# Altium PCB isa_fdc.PcbDoc (part 1 of 2)
Units mm, origin at the board's own origin, x right, y up, seen from the top; angles counter-clockwise.
Board outline 104.14 x 83.82 mm, 2 copper layers (F.Cu, B.Cu); 36 components, 102 nets, 408 pads, 101 vias.
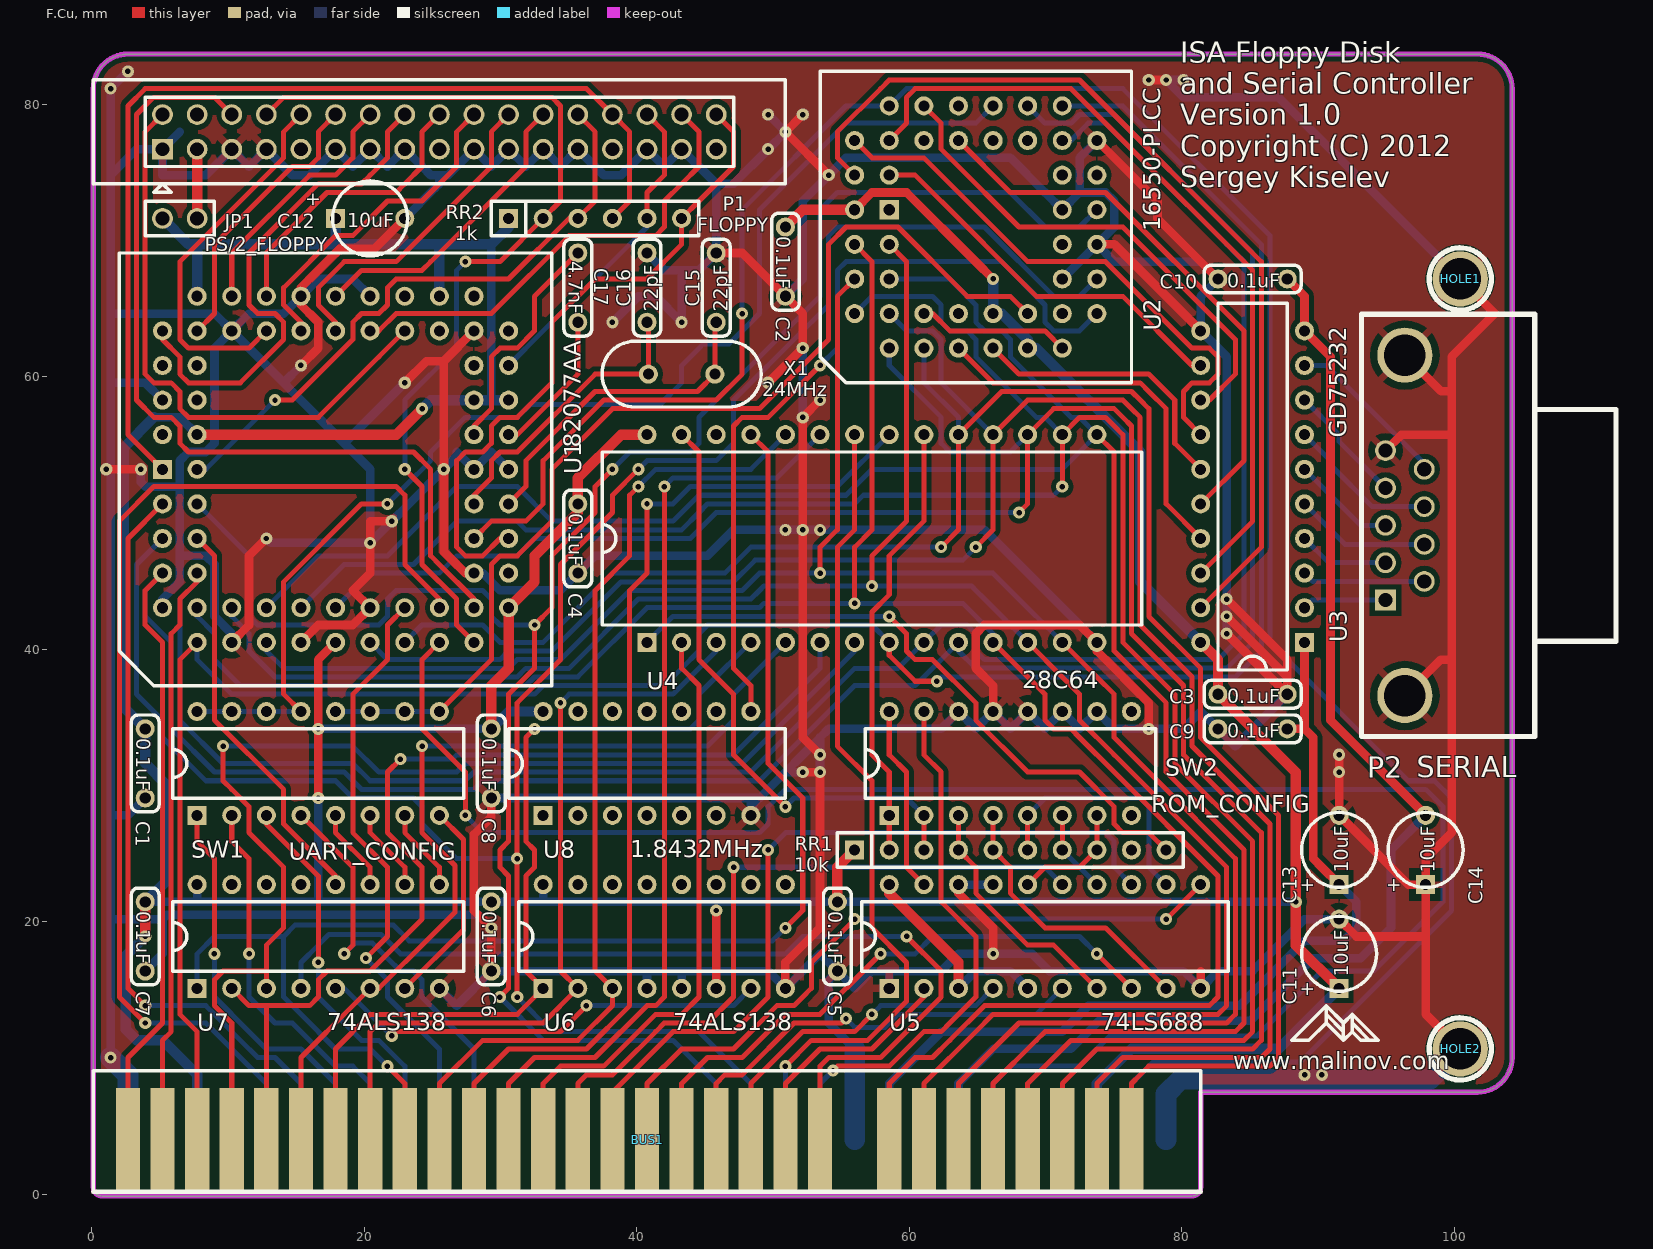
[diagram p0: F.Cu view]
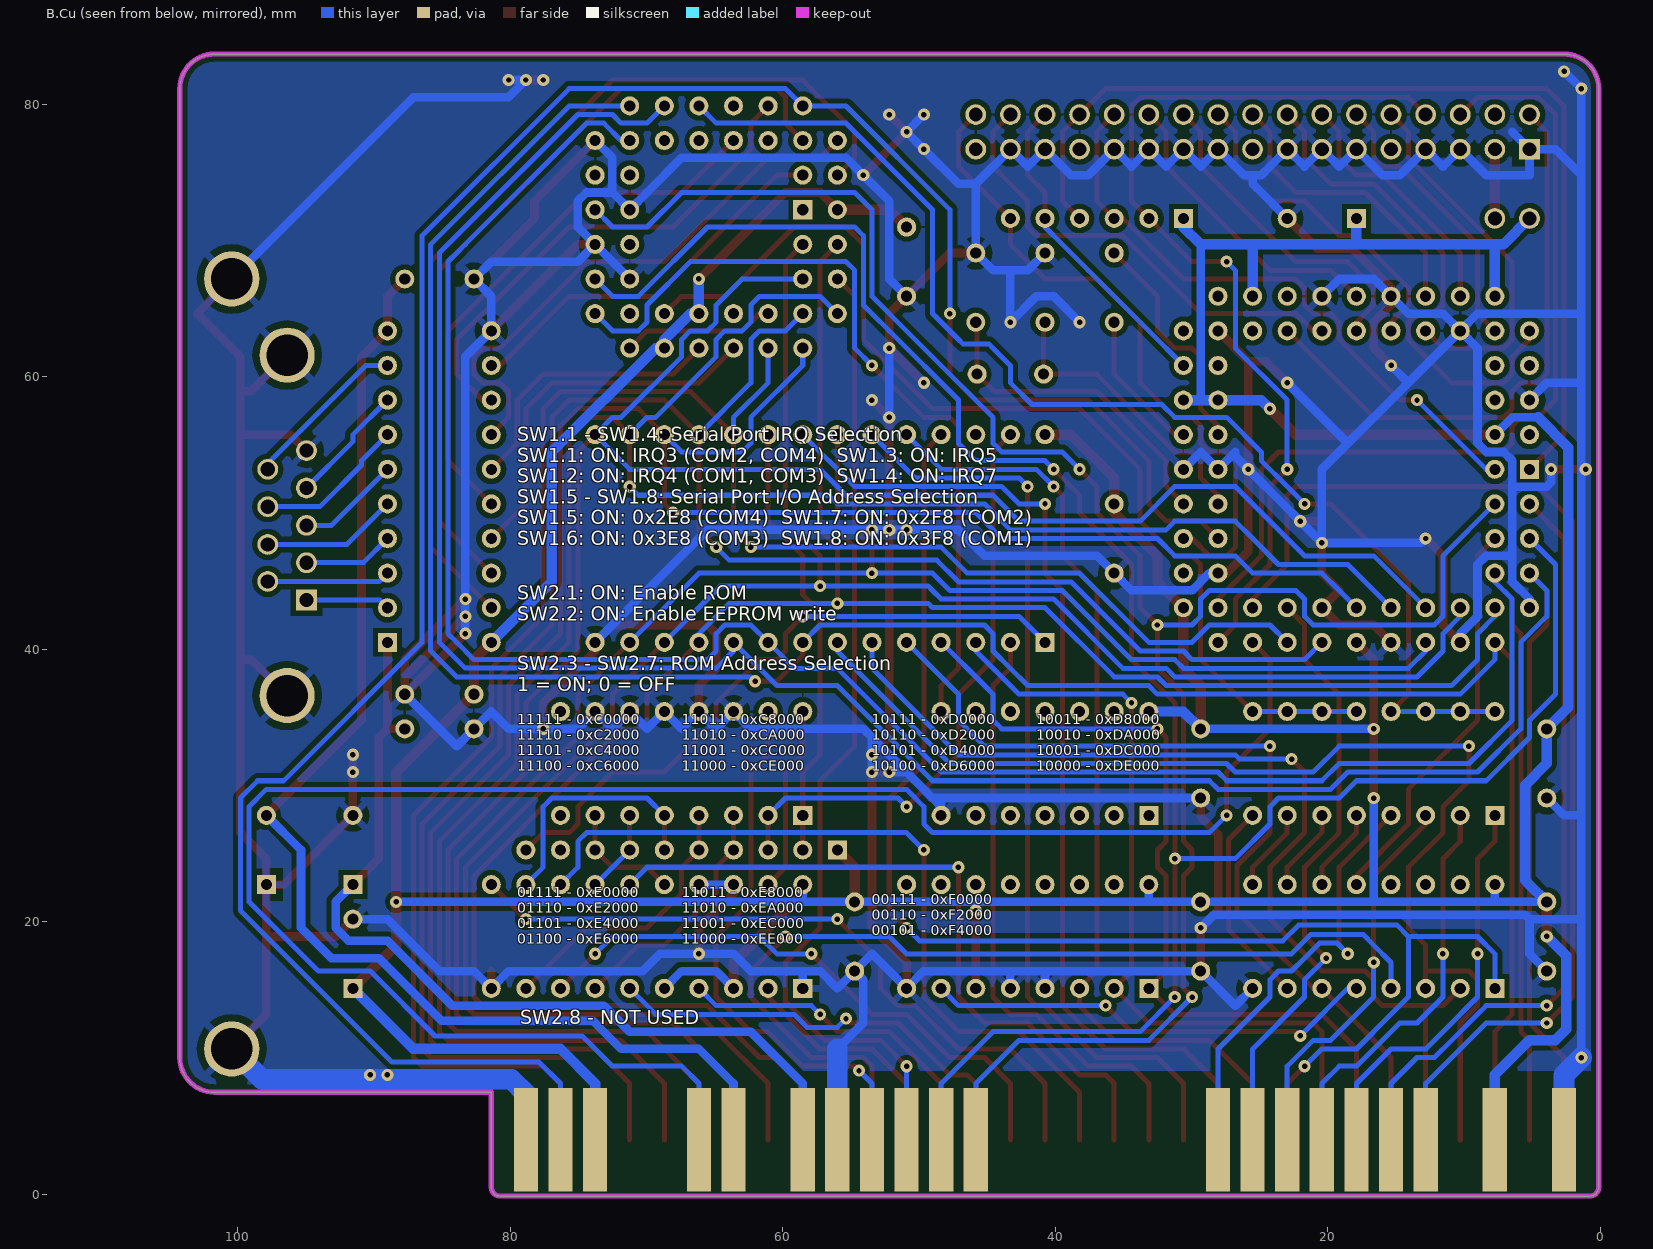
[diagram p1: B.Cu view, seen from below]

## Layer stack, top to bottom
F.Mask: solder mask 0.0102, Solder Resist, Dk 3.5
F.Cu: signal copper 0.0356
Dielectric 1: dielectric 0.32, FR-4, Dk 4.8
B.Cu: signal copper 0.0356
B.Mask: solder mask 0.0102, Solder Resist, Dk 3.5

## Board outline
104.267,81.153 104.267,10.033 cw(c101.727,10.033) 101.727,7.493 81.407,7.493 81.407,0.508 cw(c80.772,0.508) 80.772,-0.127 0.762,-0.127 cw(c0.762,0.508) 0.127,0.508 0.127,81.153 cw(c2.667,81.153) 2.667,83.693 101.727,83.693 cw(c101.727,81.153) 104.267,81.153

## Design rules (kind name [scope] priority, off if disabled: settings)
Clearance "Clearence 0.37846_Polygon" [InNamedPolygon('F.Cu-GND') OR InNamedPolygon('B.Cu-GND')] p1: gap=0.378 ignorepadtopadclearanceinfootprint=FALSE
MinimumSolderMaskSliver [All] p1: minsoldermaskwidth=0
PolygonConnect Polygon_B.Cu-GND_ConnectDirect [IsNamedPolygon('B.Cu-GND') vs IsVia] p1: connectstyle=Direct reliefconductorwidth=0.254 reliefentries=4 polygonreliefangle="90 Angle" airgapwidth=0.254
PolygonConnect Polygon_B.Cu-GND_ConnectRelief45 [IsNamedPolygon('B.Cu-GND') vs (IsThruPin or IsSMTPin) and (PadShape_AllLayers = 'Round')] p2: connectstyle=Relief reliefconductorwidth=0.508 reliefentries=4 polygonreliefangle="45 Angle" airgapwidth=0.508
PolygonConnect Polygon_B.Cu-GND_ConnectRelief90 [IsNamedPolygon('B.Cu-GND') vs (IsThruPin or IsSMTPin) and (PadShape_AllLayers <> 'Round')] p3: connectstyle=Relief reliefconductorwidth=0.508 reliefentries=4 polygonreliefangle="90 Angle" airgapwidth=0.508
PolygonConnect Polygon_F.Cu-GND_ConnectDirect [IsNamedPolygon('F.Cu-GND') vs IsVia] p4: connectstyle=Direct reliefconductorwidth=0.254 reliefentries=4 polygonreliefangle="90 Angle" airgapwidth=0.254
PolygonConnect Polygon_F.Cu-GND_ConnectRelief45 [IsNamedPolygon('F.Cu-GND') vs (IsThruPin or IsSMTPin) and (PadShape_AllLayers = 'Round')] p5: connectstyle=Relief reliefconductorwidth=0.508 reliefentries=4 polygonreliefangle="45 Angle" airgapwidth=0.508
PolygonConnect Polygon_F.Cu-GND_ConnectRelief90 [IsNamedPolygon('F.Cu-GND') vs (IsThruPin or IsSMTPin) and (PadShape_AllLayers <> 'Round')] p6: connectstyle=Relief reliefconductorwidth=0.508 reliefentries=4 polygonreliefangle="90 Angle" airgapwidth=0.508
RoutingVias [All] p1: holewidth=0.711 width=1.27 viastyle="Through Hole" minholewidth=0.711 minwidth=1.27 maxholewidth=0.711 maxwidth=1.27
SilkToSilkClearance [All] p1: silktosilkclearance=0
SilkToSolderMaskClearance [IsPad] p1: minsilkscreentomaskgap=0 clearancetoexposedcopper=TRUE
SolderMaskExpansion [All] p1: expansion=0.102 istentingtop=FALSE
Width [All] p1: maxlimit=10 minlimit=0.254 preferedwidth=0.254 minimp=50.000000 maximp=50.000000 favimp=50.000000
27 further rules are at their usual default settings.

## Components (designator, comment, footprint, x,y, rotation, side; value= is the part's Value field where it differs from the comment)
BUS1 "BUSPC_DEV" Conn_Bus_ISA8 40.767,4 r0 top
C1 "0.1uF" Cap_Cer_504 3.937,31.623 r270 top
C2 "0.1uF" Cap_Cer_504 50.927,68.453 r270 top
C3 "0.1uF" Cap_Cer_504 85.217,36.703 r0 top
C4 "0.1uF" Cap_Cer_504 35.687,48.133 r270 top
C5 "0.1uF" Cap_Cer_504 54.737,18.923 r270 top
C6 "0.1uF" Cap_Cer_504 29.337,18.923 r270 top
C7 "0.1uF" Cap_Cer_504 3.937,18.923 r270 top
C8 "0.1uF" Cap_Cer_504 29.337,31.623 r270 top
C9 "0.1uF" Cap_Cer_504 85.217,34.163 r180 top
C10 "0.1uF" Cap_Cer_504 85.217,67.183 r0 top
C11 "10uF" Cap_Tant_504 91.567,17.653 r90 top
C12 "10uF" Cap_Tant_504 20.447,71.628 r0 top
C13 "10uF" Cap_Tant_504 91.567,25.273 r90 top
C14 "10uF" Cap_Tant_504 97.917,25.273 r90 top
C15 "22pF" Cap_Cer_504 45.847,66.548 r90 top
C16 "22pF" Cap_Cer_504 40.767,66.548 r90 top
C17 "4.7nF" Cap_Cer_504 35.687,66.548 r270 top
HOLE1 "CONN_1" HOLE_3MM 100.457,67.183 r0 top
HOLE2 "CONN_1" HOLE_3MM 100.457,10.668 r0 top
JP1 "PS/2_FLOPPY" Conn_Pin_Header_2x1_Nokey 6.477,71.628 r0 top
P1 "FLOPPY" Conn_Pin_Header_17x2_Shroud 25.527,77.978 r0 top
P2 "SERIAL" Conn_Dsub_DE9M 96.393,49.098 r270 top
RR1 "10k" Conn_SIL-10 67.437,25.273 r0 top
RR2 "1k" Conn_SIL-6 36.957,71.628 r0 top
SW1 "UART_CONFIG" DIP16_300 16.637,31.623 r0 top
SW2 "ROM_CONFIG" DIP16_300 67.437,31.623 r0 top
U1 "82077AA" PLCC68_TH 17.907,53.213 r90 top
U2 "16550-PLCC" PLCC44_TH 64.897,70.993 r90 top
U3 "GD75232" DIP20_300 85.217,51.943 r90 top
U4 "28C64" DIP28_600 57.277,48.133 r0 top
U5 "74LS688" DIP20_300 69.977,18.923 r0 top
U6 "74ALS138" DIP16_300 42.037,18.923 r0 top
U7 "74ALS138" DIP16_300 16.637,18.923 r0 top
U8 "1.8432MHz" DIP14_300 40.767,31.623 r0 top
X1 "24MHz" Crystal_HC-49U_Vert 43.307,60.198 r180 top

## Footprints (in the part's own frame and the unit in brackets; to place one, negate y for a bottom-side part, rotate by r counter-clockwise, add the part's x,y. Pads: shape width x height; smd on the part's side, far side on the other; paste and mask are expansions set on the pad)
Cap_Cer_504 [mil]
  round 55 hole 32 paste-55 mask+10: 1(-100,0) 2(100,0)
  silkscreen extent -140,-40 140,40
Cap_Tant_504 [mil]
  rect 55x55 hole 32 paste-55 mask+10: 1(-100,0)
  round 55 hole 32 paste-55 mask+10: 2(100,0)
  silkscreen extent -108,-108 108,108
Conn_Bus_ISA8 [mil]
  rect 70x300 smd far side paste-300 mask+10: 1(1500,0) 2(1400,0) 3(1300,0) 6(1000,0) 7(900,0) 9(700,0) 10(600,0) 11(500,0) 12(400,0) 13(300,0) 14(200,0) 21(-500,0) 22(-600,0) 23(-700,0) 24(-800,0) 25(-900,0) 26(-1000,0) 27(-1100,0) 29(-1300,0) 31(-1500,0)
  rect 70x300 smd paste-300 mask+10: 33(1400,0) 34(1300,0) 35(1200,0) 36(1100,0) 37(1000,0) 38(900,0) 39(800,0) 40(700,0) 42(500,0) 43(400,0) 44(300,0) 45(200,0) 46(100,0) 47(0,0) 48(-100,0) 49(-200,0) 50(-300,0) 51(-400,0) 52(-500,0) 53(-600,0) 54(-700,0) 55(-800,0) 56(-900,0) 57(-1000,0) 58(-1100,0) 59(-1200,0) 60(-1300,0) 61(-1400,0) 62(-1500,0)
  silkscreen extent -1600,-150 1600,200
Conn_Dsub_DE9M [mil]
  rect 60x60 hole 41 paste-60 mask+10: 1(216,-56)
  round 60 hole 41 paste-60 mask+10: 2(108,-56) 3(0,-56) 4(-108,-56) 5(-216,-56) 6(162,56) 7(55,56) 8(-54,56) 9(-162,56)
  round 159.4 hole 120.1 paste-159.4 mask+10: Un1(491.9,0) Un2(-491.9,0)
  silkscreen extent -610,-125 610,610
Conn_Pin_Header_2x1_Nokey [mil]
  rrect100% 60x60 hole 40 paste-60 mask+10: 1(-50,0)
  round 60 hole 40 paste-60 mask+10: 2(50,0)
  silkscreen extent -100,-50 100,50
Conn_Pin_Header_17x2_Shroud [mil]
  rect 60x60 hole 40 paste-60 mask+10: 1(-800,-50)
  round 60 hole 40 paste-60 mask+10: 2(-800,50) 3(-700,-50) 4(-700,50) 5(-600,-50) 6(-600,50) 7(-500,-50) 8(-500,50) 9(-400,-50) 10(-400,50) 11(-300,-50) 12(-300,50) 13(-200,-50) 14(-200,50) 15(-100,-50) 16(-100,50) 17(0,-50) 18(0,50) 19(100,-50) 20(100,50) 21(200,-50) 22(200,50) 23(300,-50) 24(300,50) 25(400,-50) 26(400,50) 27(500,-50) 28(500,50) 29(600,-50) 30(600,50) 31(700,-50) 32(700,50) 33(800,-50) 34(800,50)
  silkscreen extent -1000,-175 1000,150
Conn_SIL-6 [mil]
  rect 55x55 hole 32 paste-55 mask+10: 1(-250,0)
  round 55 hole 32 paste-55 mask+10: 2(-150,0) 3(-50,0) 4(50,0) 5(150,0) 6(250,0)
  silkscreen extent -300,-50 300,50
Conn_SIL-10 [mil]
  rect 55x55 hole 32 paste-55 mask+10: 1(-450,0)
  round 55 hole 32 paste-55 mask+10: 2(-350,0) 3(-250,0) 4(-150,0) 5(-50,0) 6(50,0) 7(150,0) 8(250,0) 9(350,0) 10(450,0)
  silkscreen extent -500,-50 500,50
Crystal_HC-49U_Vert [mil]
  round 55 hole 32 paste-55 mask+10: 1(-96.1,0) 2(96.1,0)
  silkscreen extent -230,-95 230,95
DIP14_300 [mil]
  rect 55x55 hole 32 paste-55 mask+10: 1(-300,-150)
  round 55 hole 32 paste-55 mask+10: 2(-200,-150) 3(-100,-150) 4(0,-150) 5(100,-150) 6(200,-150) 7(300,-150) 8(300,150) 9(200,150) 10(100,150) 11(0,150) 12(-100,150) 13(-200,150) 14(-300,150)
  silkscreen extent -400,-100 400,100
DIP16_300 [mil]
  rect 55x55 hole 32 paste-55 mask+10: 1(-350,-150)
  round 55 hole 32 paste-55 mask+10: 2(-250,-150) 3(-150,-150) 4(-50,-150) 5(50,-150) 6(150,-150) 7(250,-150) 8(350,-150) 9(350,150) 10(250,150) 11(150,150) 12(50,150) 13(-50,150) 14(-150,150) 15(-250,150) 16(-350,150)
  silkscreen extent -420,-100 420,100
DIP20_300 [mil]
  rect 55x55 hole 32 paste-55 mask+10: 1(-450,-150)
  round 55 hole 32 paste-55 mask+10: 2(-350,-150) 3(-250,-150) 4(-150,-150) 5(-50,-150) 6(50,-150) 7(150,-150) 8(250,-150) 9(350,-150) 10(450,-150) 11(450,150) 12(350,150) 13(250,150) 14(150,150) 15(50,150) 16(-50,150) 17(-150,150) 18(-250,150) 19(-350,150) 20(-450,150)
  silkscreen extent -530,-100 530,100
DIP28_600 [mil]
  rect 55x55 hole 32 paste-55 mask+10: 1(-650,-300)
  round 55 hole 32 paste-55 mask+10: 2(-550,-300) 3(-450,-300) 4(-350,-300) 5(-250,-300) 6(-150,-300) 7(-50,-300) 8(50,-300) 9(150,-300) 10(250,-300) 11(350,-300) 12(450,-300) 13(550,-300) 14(650,-300) 15(650,300) 16(550,300) 17(450,300) 18(350,300) 19(250,300) 20(150,300) 21(50,300) 22(-50,300) 23(-150,300) 24(-250,300) 25(-350,300) 26(-450,300) 27(-550,300) 28(-650,300)
  silkscreen extent -780,-250 780,250
HOLE_3MM [mil]
  round 160 hole 120 paste-160 mask+10: 1(0,0)
  silkscreen extent -90,-90 90,90
PLCC44_TH [mil]
  rect 55x55 hole 32 paste-55 mask+10: 1(50,250)
  round 55 hole 32 paste-55 mask+10: 2(-50,350) 3(-50,250) 4(-150,350) 5(-150,250) 6(-250,350) 7(-350,250) 8(-250,250) 9(-350,150) 10(-250,150) 11(-350,50) 12(-250,50) 13(-350,-50) 14(-250,-50) 15(-350,-150) 16(-250,-150) 17(-350,-250) 18(-250,-350) 19(-250,-250) 20(-150,-350) 21(-150,-250) 22(-50,-350) 23(-50,-250) 24(50,-350) 25(50,-250) 26(150,-350) 27(150,-250) 28(250,-350) 29(350,-250) 30(250,-250) 31(350,-150) 32(250,-150) 33(350,-50) 34(250,-50) 35(350,50) 36(250,50) 37(350,150) 38(250,150) 39(350,250) 40(250,350) 41(250,250) 42(150,350) 43(150,250) 44(50,350)
  silkscreen extent -450,-450 450,450
PLCC68_TH [mil]
  rect 55x55 hole 32 paste-55 mask+10: 1(0,500)
  round 55 hole 32 paste-55 mask+10: 2(0,400) 3(-100,500) 4(-100,400) 5(-200,500) 6(-200,400) 7(-300,500) 8(-300,400) 9(-400,500) 10(-500,400) 11(-400,400) 12(-500,300) 13(-400,300) 14(-500,200) 15(-400,200) 16(-500,100) 17(-400,100) 18(-500,0) 19(-400,0) 20(-500,-100) 21(-400,-100) 22(-500,-200) 23(-400,-200) 24(-500,-300) 25(-400,-300) 26(-500,-400) 27(-400,-500) 28(-400,-400) 29(-300,-500) 30(-300,-400) 31(-200,-500) 32(-200,-400) 33(-100,-500) 34(-100,-400) 35(0,-500) 36(0,-400) 37(100,-500) 38(100,-400) 39(200,-500) 40(200,-400) 41(300,-500) 42(300,-400) 43(400,-500) 44(500,-400) 45(400,-400) 46(500,-300) 47(400,-300) 48(500,-200) 49(400,-200) 50(500,-100) 51(400,-100) 52(500,0) 53(400,0) 54(500,100) 55(400,100) 56(500,200) 57(400,200) 58(500,300) 59(400,300) 60(500,400) 61(400,500) 62(400,400) 63(300,500) 64(300,400) 65(200,500) 66(200,400) 67(100,500) 68(100,400)
  silkscreen extent -625,-625 625,625

## Part data
BUS1: library part Conn_Bus_ISA8, "ISA8 PCB edge connector"
C1 C2 C3 C4 C5 C6 C7 C8 C9 C10 C15 C16 C17: library part Cap_Cer_504, "Ceramic Capacitor 5.04mm"
C11 C12 C13 C14: library part Cap_Tant_504, "Tantalum Capacitor - 5.04mm"
HOLE1 HOLE2: library part HOLE_3MM, "module 1 pin (ou trou mecanique de percage)"
JP1: library part Conn_Pin_Header_2x1_Nokey, "Connector Pin Header 2x1 No Key"
P1: library part Conn_Pin_Header_17x2_Shroud, "17x2 pin header"
P2: library part Conn_Dsub_DE9M, "Connector DE9 Male Right Angle Through Hole"
RR1: library part Conn_SIL-10, "Connector SIL-10"
RR2: library part Conn_SIL-6, "Footprint - SIL-6"
SW1 SW2 U6 U7: library part DIP16_300, "16 pins DIL package, round pads"
U1: library part PLCC68_TH, "PLCC68 SOCKET THROUGH HOLE"
U2: library part PLCC44_TH, "PLCC44 SOCKET THROUGH HOLE"
U3 U5: library part DIP20_300, "20 pins DIL package, round pads"
U4: library part DIP28_600, "Module Dil 28 pins, pads ronds, e=600 mils"
U8: library part DIP14_300, "14 pins DIL package, round pads"
X1: library part Crystal_HC-49U_Vert, "Quartz Crystal HC-49U Vertical"

## Via types
v1: diameter 0.889, hole 0.4, F.Cu to B.Cu, tented both sides, 101 vias

## Nets (pads, with @x,y where several pads share a name; then routed paths per layer and width w, separated by ;. In a path a pad name is that pad's centre, name@x,y a point inside that pad or via, vN(x,y) a via of type N, cw(c..) or ccw(c..) an arc to the next point about the centre after c; other vN are vias at no path point)
0x2E8: SW1.5 U7.11 | length 6.1
  F.Cu w0.368: SW1.5@17.907,27.813 17.907,26.543 20.447,24.003 U7.11@20.447,22.733
0x2F8: SW1.7 U7.9 | length 6.1
  F.Cu w0.368: SW1.7@22.987,27.813 22.987,26.543 25.527,24.003 U7.9@25.527,22.733
0x3E8: SW1.6 U7.10 | length 6.1
  F.Cu w0.368: SW1.6@20.447,27.813 20.447,26.543 22.987,24.003 U7.10@22.987,22.733
0x3F8: SW1.8 U7.7 | length 15.2
  F.Cu w0.368: U7.7@22.987,15.113 27.3,19.426 27.3,25.908 27.3,26.04 SW1.8@25.527,27.813
A0: BUS1.62 U1.7 U2.31 U4.10 | length 194.2
  F.Cu w0.368: BUS1.62@2.667,4 2.667,10.033 5.207,12.573 5.207,13.843 5.207,17.018 5.207,40.513 3.937,41.783 3.937,44.323 U1.7@5.207,45.593
  B.Cu w0.368: U1.7@5.207,45.593 3.937,44.323 3.937,42.418 5.842,40.513 5.842,34.163 9.017,30.988 9.652,30.988 18.542,30.988 19.812,29.718 22.987,29.718 28.067,29.718 28.702,30.353 49.022,30.353 56.007,37.338 57.277,37.338 60.452,37.338 U4.10@63.627,40.513 63.627,39.878 64.897,38.608 64.892,38.613 83.317,38.613 85.217,40.513 85.217,69.088 75.057,79.248 72.517,79.248 71.882,78.613 69.977,78.613 U2.31@68.707,79.883
A1: BUS1.61 U1.8 U2.30 U4.9 | length 186.9
  F.Cu w0.368: BUS1.61@5.207,4 5.207,9.398 5.207,10.668 5.207,11.303 5.842,11.938 5.842,18.288 5.842,41.148 6.477,41.783 6.477,43.688 7.747,44.958 U1.8@7.747,45.593
  B.Cu w0.368: 6.477,35.115 6.477,34.798 ; U1.8@7.747,45.593 7.747,44.958 6.477,43.688 6.477,34.798 ; U2.30@71.247,77.343 71.882,77.343 73.152,78.613 74.422,78.613 83.312,69.723 83.947,69.088 83.952,69.088 84.582,68.458 84.582,41.148 83.947,40.513 82.677,39.243 65.532,39.243 64.897,39.878 64.897,41.148 64.262,41.783 62.357,41.783 U4.9@61.087,40.513 59.182,38.608 57.277,38.608 56.007,38.608 48.387,30.988 28.067,30.988 27.432,30.353 20.447,30.353 19.177,31.623 9.652,31.623 6.477,34.798
A2: BUS1.60 U1.10 U2.29 U4.8 | length 172.7
  F.Cu w0.368: BUS1.60@7.747,4 7.747,11.938 6.477,13.208 6.477,18.923 6.477,39.243 U1.10@7.747,40.513 ; U4.8@58.547,40.513 58.547,39.56 60.452,37.655 v1(62.039,37.655)
  B.Cu w0.368: U1.10@7.747,40.513 7.747,39.243 10.282,36.708 32.512,36.708 32.517,36.708 33.147,37.338 42.037,37.338 43.307,38.608 44.577,39.878 44.577,41.148 45.212,41.783 57.277,41.783 U4.8@58.547,40.513 ; v1(62.039,37.655) 62.357,37.973 62.992,37.973 63.627,37.973 83.947,37.973 85.852,39.878 85.852,69.723 75.692,79.883 U2.29@71.247,79.883
A3: BUS1.59 U4.7 U7.3 | length 88
  F.Cu w0.368: v1(9.652,32.893) 9.652,30.353 10.287,29.718 11.557,28.448 11.557,27.178 11.557,26.543 14.097,24.003 14.097,19.558 12.827,18.288 12.827,16.383 ; BUS1.59@10.287,4 10.287,10.668 10.287,12.573 9.017,13.843 9.017,15.748 9.652,16.383 12.827,16.383 ; U7.3@12.827,15.113 12.827,16.383
  B.Cu w0.368: v1(9.652,32.893) 10.287,32.893 19.177,32.893 21.082,30.988 24.257,30.988 26.802,30.988 27.437,31.623 28.707,31.623 ; 28.702,31.628 28.707,31.623 ; U4.7@56.007,40.513 56.007,39.878 47.752,31.623 28.707,31.623
A4: BUS1.58 U4.6 U7.2 | length 76.4
  F.Cu w0.368: U7.2@10.287,15.113 11.557,13.843 12.827,13.843 ; BUS1.58@12.827,4 12.827,11.938 12.827,13.843 ; v1(22.669,31.941) 21.717,30.988 21.717,26.543 24.257,24.003 24.257,20.193 20.447,16.383 17.907,16.383 17.272,16.383 16.637,15.748 16.637,14.478 16.002,13.843 12.827,13.843
  B.Cu w0.368: v1(22.669,31.941) 26.479,31.941 26.797,32.258 28.067,32.258 47.117,32.258 52.832,37.973 53.467,38.608 U4.6@53.467,40.513
A5: BUS1.57 U4.5 U7.6 | length 71.9
  F.Cu w0.368: BUS1.57@15.367,4 15.367,10.033 19.177,13.843 U7.6@20.447,15.113 ; v1(24.257,32.893) 24.257,29.083 24.257,26.543 26.67,24.13 26.67,20.701 U7.6@21.082,15.113 ; 24.892,18.923 U7.6@21.082,15.113 ; U7.6@20.447,15.113 U7.6@21.082,15.113 ; U7.6@20.447,15.113 U7.6@21.082,15.113
  B.Cu w0.368: v1(24.257,32.893) 43.942,32.893 45.212,32.893 47.117,34.798 47.117,36.703 U4.5@50.927,40.513
A6: BUS1.56 U4.4 U6.1 | length 63.7
  F.Cu w0.368: BUS1.56@17.907,4 17.907,10.668 20.447,13.208 31.242,13.208 U6.1@33.147,15.113 31.877,16.383 31.877,23.368 32.512,24.003 32.512,25.273 31.877,25.908 31.877,26.543 31.877,32.893 31.877,33.528 v1(32.512,34.163)
  B.Cu w0.368: v1(32.512,34.163) 33.782,34.163 41.402,34.163 43.942,34.163 44.577,34.798 44.577,36.703 45.212,37.338 U4.4@48.387,40.513
A7: BUS1.55 U4.3 U6.2 | length 59.6
  F.Cu w0.368: BUS1.55@20.447,4 20.447,11.303 20.447,11.938 21.082,12.573 33.147,12.573 U6.2@35.687,15.113 34.417,16.383 34.417,34.163 v1(34.417,36.068)
  B.Cu w0.368: v1(34.417,36.068) 35.052,36.703 42.672,36.703 43.307,37.338 43.942,37.973 45.847,39.878 U4.3@45.847,40.513
A8: BUS1.54 U4.25 U7.1 | length 105.8
  F.Cu w0.368: v1(21.717,9.398) 22.987,8.128 BUS1.54@22.987,4 ; U4.25@48.387,55.753 49.657,54.483 49.657,31.623 52.197,29.083 52.197,20.828 v1(50.927,19.558)
  B.Cu w0.368: U7.1@7.747,15.113 7.747,17.335 7.747,17.653 9.017,18.923 14.097,18.923 ; v1(21.717,9.398) 20.447,10.668 19.177,10.668 17.907,10.668 15.367,13.208 14.097,14.478 14.097,17.018 14.097,18.288 14.097,18.923 ; v1(50.927,19.558) 49.974,18.605 23.304,18.605 22.162,19.748 16.002,19.748 14.922,19.748 14.097,18.923
A9: BUS1.53 U4.24 U6.3 | length 71.5
  F.Cu w0.368: BUS1.53@25.527,4 25.527,8.128 28.702,11.303 29.337,11.303 35.687,11.303 38.227,13.843 U6.3@38.227,15.113 36.957,16.383 36.957,25.908 36.957,44.323 39.497,46.863 39.497,51.308 v1(40.132,51.943)
  B.Cu w0.368: v1(40.132,51.943) 41.402,53.213 48.387,53.213 U4.24@50.927,55.753
A10: BUS1.52 U4.21 | length 75.2
  F.Cu w0.368: BUS1.52@28.067,4 28.067,8.128 30.607,10.668 31.877,10.668 36.322,10.668 39.497,13.843 39.497,14.478 39.497,17.653 39.497,44.323 40.767,45.593 v1(40.767,50.673)
  B.Cu w0.368: v1(40.767,50.673) 42.672,50.673 43.942,51.943 54.737,51.943 U4.21@58.547,55.753
A11: BUS1.51 U4.23 | length 68.7
  F.Cu w0.368: BUS1.51@30.607,4 30.607,8.133 32.512,10.038 33.15,10.038 33.15,10.036 36.954,10.036 40.762,13.843 40.767,13.843 41.402,13.843 42.037,14.478 42.037,17.653 42.037,49.403 v1(42.037,51.943)
  B.Cu w0.368: v1(42.037,51.943) 42.037,51.948 42.667,52.578 50.292,52.578 U4.23@53.467,55.753
A12: BUS1.50 U4.2 | length 44.7
  F.Cu w0.368: BUS1.50@33.147,4 33.147,8.128 34.42,9.401 35.055,9.401 37.589,9.401 41.397,13.208 41.402,13.208 42.037,13.208 42.672,13.208 43.307,13.208 44.577,14.478 44.577,17.653 44.577,37.338 43.307,38.608 U4.2@43.307,40.513
A13: BUS1.49 U5.15 | length 52.4
  F.Cu w0.368: BUS1.49@35.687,4 35.687,8.128 36.322,8.763 36.957,8.763 38.227,8.763 38.862,9.398 41.402,11.938 42.032,12.568 42.037,12.568 42.037,12.573 42.675,12.573 43.307,12.573 45.212,12.573 47.117,14.478 47.117,17.653 v1(47.117,24.003)
  B.Cu w0.368: v1(47.117,24.003) 69.977,24.003 U5.15@71.247,22.733
A14: BUS1.48 U5.13 | length 58.5
  F.Cu w0.368: BUS1.48@38.227,4 38.227,7.485 42.675,11.933 42.675,11.941 42.672,11.938 43.937,11.938 43.947,11.938 47.117,11.938 49.022,13.843 49.657,14.478 v1(49.657,25.273)
  B.Cu w0.368: v1(49.657,25.273) 50.927,26.543 74.422,26.543 75.057,25.908 75.057,25.273 75.057,24.003 U5.13@76.327,22.733
A15: BUS1.47 U5.11 | length 51.9
  F.Cu w0.368: BUS1.47@40.767,4 40.767,8.128 43.307,10.668 43.942,10.668 47.117,10.668 50.292,13.843 51.562,13.843 52.197,14.478 52.832,15.113 52.832,16.383 52.832,17.018 v1(56.007,20.193) ; v1(78.867,20.193) U5.11@81.407,22.733
  B.Cu w0.368: v1(56.007,20.193) 70.612,20.193 78.232,20.193 v1(78.867,20.193)
A16: BUS1.46 U5.8 | length 43.2
  F.Cu w0.368: BUS1.46@43.307,4 43.307,8.128 45.212,10.033 45.847,10.033 47.117,10.033 47.752,10.033 50.927,13.208 53.467,13.208 57.277,17.018 v1(57.912,17.653) ; v1(73.787,17.653) U5.8@76.327,15.113
  B.Cu w0.368: v1(57.912,17.653) 60.452,17.653 61.722,18.923 72.517,18.923 v1(73.787,17.653)
A17: BUS1.45 U5.6 | length 32.9
  F.Cu w0.368: BUS1.45@45.847,4 45.847,8.128 46.482,8.763 47.117,8.763 47.752,8.763 51.562,12.573 52.197,12.573 54.737,12.573 55.054,12.573 v1(55.372,12.89)
  B.Cu w0.368: v1(55.372,12.89) 56.007,12.255 58.229,12.255 58.547,12.573 59.182,13.208 69.342,13.208 U5.6@71.247,15.113
A18: BUS1.44 U5.4 | length 24.8
  F.Cu w0.368: BUS1.44@48.387,4 48.387,8.128 52.202,11.943 52.832,11.943 52.832,11.938 56.007,11.938 v1(57.277,13.208)
  B.Cu w0.368: v1(57.277,13.208) 57.912,13.843 64.897,13.843 U5.4@66.167,15.113
A19: BUS1.43 U5.2 | length 17.6
  F.Cu w0.368: BUS1.43@50.927,4 50.927,8.128 53.467,10.668 54.102,10.668 57.277,10.668 61.087,14.478 U5.2@61.087,15.113
AEN: BUS1.42 U7.4 | length 70.2
  F.Cu w0.368: BUS1.42@53.467,4 53.467,8.128 53.467,8.763 53.467,9.398 54.107,10.038 54.737,10.038 54.737,10.033 57.912,10.033 62.357,14.478 62.357,15.748 62.357,16.383 v1(59.817,18.923)
  B.Cu w0.368: U7.4@15.367,15.113 15.367,17.018 16.637,18.288 17.429,19.08 21.242,19.08 22.669,17.653 50.927,17.653 52.197,18.923 v1(59.817,18.923)
CTS: P2.8 U3.7 | length 11.2
  B.Cu w0.368: U3.7@89.027,55.753 90.297,54.483 90.932,53.848 90.932,53.53 93.993,50.47 94.107,50.47 P2.8@97.815,50.47
D0: BUS1.40 U1.11 U2.2 U4.11 | length 159.5
  F.Cu w0.368: v1(56.007,43.37) 56.007,47.498 57.277,48.768 57.277,53.848 57.277,68.453 U2.2@56.007,69.723 ; BUS1.40@58.547,4 58.547,8.128 60.452,10.033 61.722,10.033 62.992,11.303 65.532,13.843 82.042,13.843 82.677,14.478 82.677,23.368 75.057,30.988 72.517,33.528 71.882,34.163 70.612,34.163 69.977,34.798 69.977,36.703 69.342,37.338 U4.11@66.167,40.513
  B.Cu w0.368: U1.11@7.747,43.053 7.747,42.418 9.017,41.148 9.017,39.243 10.922,37.338 31.877,37.338 32.512,37.973 35.047,37.973 35.049,37.976 35.69,37.976 40.767,43.053 49.022,43.053 49.34,43.37 v1(56.007,43.37) 63.944,43.37 U4.11@66.167,41.148 ; U4.11@66.167,40.513 U4.11@66.167,41.148 ; U4.11@66.167,40.513 U4.11@66.167,41.148 ; U4.11@66.167,40.513 U4.11@66.167,41.148
D1: BUS1.39 U1.13 U2.3 U4.12 | length 154.2
  F.Cu w0.368: v1(57.277,44.64) 57.277,46.863 59.817,49.403 59.817,55.118 59.817,68.453 U2.3@58.547,69.723 ; BUS1.39@61.087,4 61.087,8.128 64.897,11.938 66.167,13.208 81.407,13.208 82.677,13.208 83.312,13.843 83.312,24.003 77.597,29.718 75.057,32.258 72.517,34.798 72.517,36.703 71.882,37.338 71.247,37.973 U4.12@68.707,40.513
  B.Cu w0.368: U1.13@10.287,43.053 10.287,42.418 11.557,41.148 11.557,39.878 13.462,37.973 31.242,37.973 31.877,38.608 34.417,38.608 35.052,38.608 40.132,43.688 45.847,43.688 48.387,43.688 49.022,44.323 49.34,44.64 v1(57.277,44.64) 64.579,44.64 64.897,44.323 65.532,43.688 U4.12@68.707,40.513
D2: BUS1.38 U1.14 U2.4 U4.13 | length 146.3
  F.Cu w0.368: v1(53.467,45.593) 53.467,47.498 54.737,48.768 54.737,54.483 54.737,64.008 54.737,65.913 U2.4@56.007,67.183 ; BUS1.38@63.627,4 63.627,8.128 68.072,12.573 68.072,12.578 83.312,12.578 83.947,13.213 83.947,24.638 78.232,30.353 75.057,33.528 75.057,36.703 73.787,37.973 73.152,38.608 U4.13@71.247,40.513
  B.Cu w0.368: U1.14@12.827,40.513 12.827,39.878 14.097,38.608 30.607,38.608 31.242,39.243 33.782,39.243 34.417,39.243 39.497,44.323 45.212,44.323 47.752,44.323 49.022,45.593 v1(53.467,45.593) 66.167,45.593 67.437,44.323 U4.13@71.247,40.513
D3: BUS1.37 U1.15 U2.5 U4.15 | length 161.8
  F.Cu w0.368: BUS1.37@66.167,4 66.167,8.128 69.342,11.303 69.977,11.938 82.677,11.938 83.942,11.938 ; U4.15@73.787,55.753 75.057,54.483 75.057,41.148 75.057,39.878 78.867,36.068 78.867,30.993 84.582,25.278 84.582,12.573 83.947,11.938 83.942,11.938 ; 83.947,11.943 83.942,11.938
  B.Cu w0.368: U1.15@12.827,43.053 16.637,46.863 21.717,46.863 24.257,49.403 24.892,50.038 26.797,51.943 31.242,51.943 33.782,49.403 35.052,49.403 42.672,49.403 44.577,51.308 55.372,51.308 57.277,53.213 71.247,53.213 U4.15@73.787,55.753 72.517,57.023 71.882,57.023 67.437,61.468 67.437,62.738 66.802,63.373 65.532,63.373 64.897,64.008 64.897,64.643 64.897,65.278 62.992,67.183 U2.5@58.547,67.183
D4: BUS1.36 U1.17 U2.6 U4.16 | length 160.8
  F.Cu w0.368: BUS1.36@68.707,4 68.707,8.128 71.247,10.668 71.882,11.303 83.312,11.303 84.582,11.303 ; v1(71.247,51.943) U4.16@71.247,55.753 ; U4.16@71.252,55.758 U4.16@71.247,55.753 ; 84.577,11.303 84.582,11.303 ; U4.16@71.247,55.753 72.517,57.023 74.422,57.023 75.057,56.388 75.692,55.753 75.692,41.783 75.692,40.513 79.505,36.7 79.505,31.62 85.217,25.908 85.217,11.938 84.582,11.303
  B.Cu w0.368: U1.17@15.367,43.053 18.542,46.228 23.622,46.228 25.527,48.133 26.797,49.403 31.242,49.403 31.872,48.773 32.507,48.773 33.782,48.773 35.687,48.773 35.687,48.768 43.307,48.768 44.577,50.038 45.212,50.673 56.007,50.673 56.642,51.308 67.437,51.308 70.612,51.308 v1(71.247,51.943) ; U2.6@56.007,64.643 57.277,65.913 61.722,65.913 62.357,65.278 62.357,64.008 62.992,63.373 64.262,63.373 64.897,62.738 64.897,61.468 69.342,57.023 69.977,57.023 U4.16@71.247,55.753
D5: BUS1.35 U1.19 U2.7 U4.17 | length 152.8
  F.Cu w0.368: v1(68.072,50.038) 68.707,50.673 U4.17@68.707,55.753 70.612,57.658 75.057,57.658 75.692,57.023 76.327,56.388 76.327,42.418 76.327,41.148 80.137,37.338 80.137,32.258 85.852,26.543 85.852,11.303 85.217,10.668 83.947,10.668 73.787,10.668 73.152,10.033 71.247,8.128 BUS1.35@71.247,4
  B.Cu w0.368: U1.19@17.907,43.053 19.177,44.323 20.447,45.593 25.527,45.593 26.797,46.863 31.242,46.863 32.512,48.133 33.782,48.133 34.417,48.133 36.322,48.133 43.942,48.133 45.847,50.038 56.642,50.038 v1(68.072,50.038) ; U2.7@58.547,62.103 58.547,60.833 62.357,57.023 62.357,55.118 62.992,54.483 67.437,54.483 U4.17@68.707,55.753
D6: BUS1.34 U1.20 U2.8 U4.18 | length 150.9
  F.Cu w0.368: v1(64.897,47.498) 66.167,48.768 U4.18@66.167,55.753 68.707,58.293 75.692,58.293 76.327,57.658 76.962,57.023 76.962,43.048 76.967,43.043 76.962,43.043 76.962,41.783 80.767,37.978 80.767,32.898 86.487,27.178 86.487,10.668 85.852,10.033 85.847,10.033 84.582,10.033 75.692,10.033 73.787,8.128 BUS1.34@73.787,4
  B.Cu w0.368: U1.20@20.447,40.513 21.717,39.243 29.972,39.243 30.607,39.878 33.147,39.878 33.782,39.878 38.862,44.958 44.577,44.958 47.117,44.958 48.704,46.545 63.944,46.545 v1(64.897,47.498) ; U2.8@58.547,64.643 59.817,63.373 61.722,63.373 62.357,62.738 62.357,61.468 62.357,60.833 62.357,59.563 U4.18@66.167,55.753
D7: BUS1.33 U1.22 U2.9 U4.19 | length 142.6
  F.Cu w0.368: v1(62.357,47.498) 63.627,48.768 U4.19@63.627,55.753 66.802,58.928 76.327,58.928 76.962,58.293 77.597,57.658 77.597,43.688 77.597,42.413 81.402,38.608 81.402,38.603 ; BUS1.33@76.327,4 76.327,8.128 76.962,8.763 76.962,8.768 77.592,9.398 ; 81.397,38.608 81.402,38.603 ; 77.592,9.398 77.592,9.403 77.592,9.398 ; 77.592,9.398 85.217,9.398 86.487,9.398 87.122,10.033 87.122,27.813 81.407,33.528 81.407,38.598 81.402,38.603
  B.Cu w0.368: U1.22@22.987,40.513 24.257,41.783 28.702,41.783 29.972,40.513 32.512,40.513 33.147,40.513 38.227,45.593 43.942,45.593 46.482,45.593 48.387,47.498 v1(62.357,47.498) ; U2.9@61.087,62.103 61.087,60.833 61.087,59.563 63.627,57.023 U4.19@63.627,55.753
DCD: P2.1 U3.2 | length 7
  B.Cu w0.368: P2.1@94.971,43.612 89.586,43.612 ; 89.586,43.612 U3.2@89.027,43.053 89.586,43.612
DENSL: P1.2 U1.49 | length 43.3
  F.Cu w0.368: P1.2@5.207,79.248 3.937,77.978 3.937,60.198 4.572,59.563 5.842,59.563 6.477,58.928 6.477,57.658 7.112,57.023 16.637,57.023 21.082,61.468 U1.49@22.987,63.373
DIR: P1.18 U1.56 | length 21.6
  F.Cu w0.368: U1.56@12.827,65.913 12.827,69.088 17.272,73.533 17.912,73.533 22.352,73.533 22.992,74.173 22.987,74.168 24.257,75.438 24.257,77.978 P1.18@25.527,79.248
DRQ2: BUS1.6 U1.24 | length 139.1
  F.Cu w0.368: U1.24@25.527,40.513 24.257,39.243 24.257,34.798 24.257,34.163 27.432,30.988 v1(27.432,27.813)
  B.Cu w0.368: v1(27.432,27.813) 28.702,26.543 49.022,26.543 49.657,27.178 49.657,28.448 50.927,29.718 97.917,29.718 99.187,28.448 99.187,21.463 94.107,16.383 90.297,16.383 85.534,11.62 74.739,11.62 74.422,11.303 72.517,9.398 67.437,9.398 66.167,8.128 BUS1.6@66.167,4
DSA: P1.14 U1.58 | length 18.7
  F.Cu w0.368: U1.58@10.287,65.913 10.287,68.453 10.287,69.088 16.002,74.803 17.907,74.803 18.542,75.438 19.177,76.073 19.177,77.978 P1.14@20.447,79.248
DSB: P1.12 U1.62 | length 24
  F.Cu w0.368: U1.62@7.747,63.373 9.017,64.643 ; 9.017,67.818 9.017,64.643 ; P1.12@17.907,79.248 16.637,77.978 16.637,76.073 16.002,75.438 14.732,75.438 9.017,69.723 9.017,69.088 9.017,64.643
DSKCG: P1.34 RR2.6 U1.31 | length 49
  F.Cu w0.368: U1.31@30.607,48.133 29.972,48.133 28.702,46.863 27.432,46.863 26.797,47.498 26.797,48.768 26.797,53.848 27.432,54.483 28.702,54.483 29.337,55.118 29.337,56.388 29.972,57.023 31.242,57.023 33.782,59.563 33.782,64.008 36.957,67.183 40.767,67.183 43.307,69.723 RR2.6@43.307,71.628 44.577,72.898 47.117,75.438 47.117,75.755 47.117,76.073 47.117,77.978 P1.34@45.847,79.248
DSR: P2.6 U3.3 | length 9.9
  B.Cu w0.368: P2.6@97.815,44.983 89.637,44.983 ; 89.637,44.983 U3.3@89.027,45.593 89.637,44.983
DTR: P2.4 U3.8 | length 8.9
  B.Cu w0.368: U3.8@89.027,58.293 91.567,55.753 91.567,55.245 P2.4@94.971,51.841
FLOPPY_VCC: JP1.2 P1.3 | length 5.1
  F.Cu w0.762: JP1.2@7.747,71.628 P1.3@7.747,76.708